# Altium PCB FSP-485.PcbDoc
Units mm, origin at the board's own origin, x right, y up, seen from the top; angles counter-clockwise.
Board outline 152.4 x 101.6 mm, 2 copper layers (Top Layer, Bottom Layer); 62 components, 38 nets, 179 pads, 43 vias.
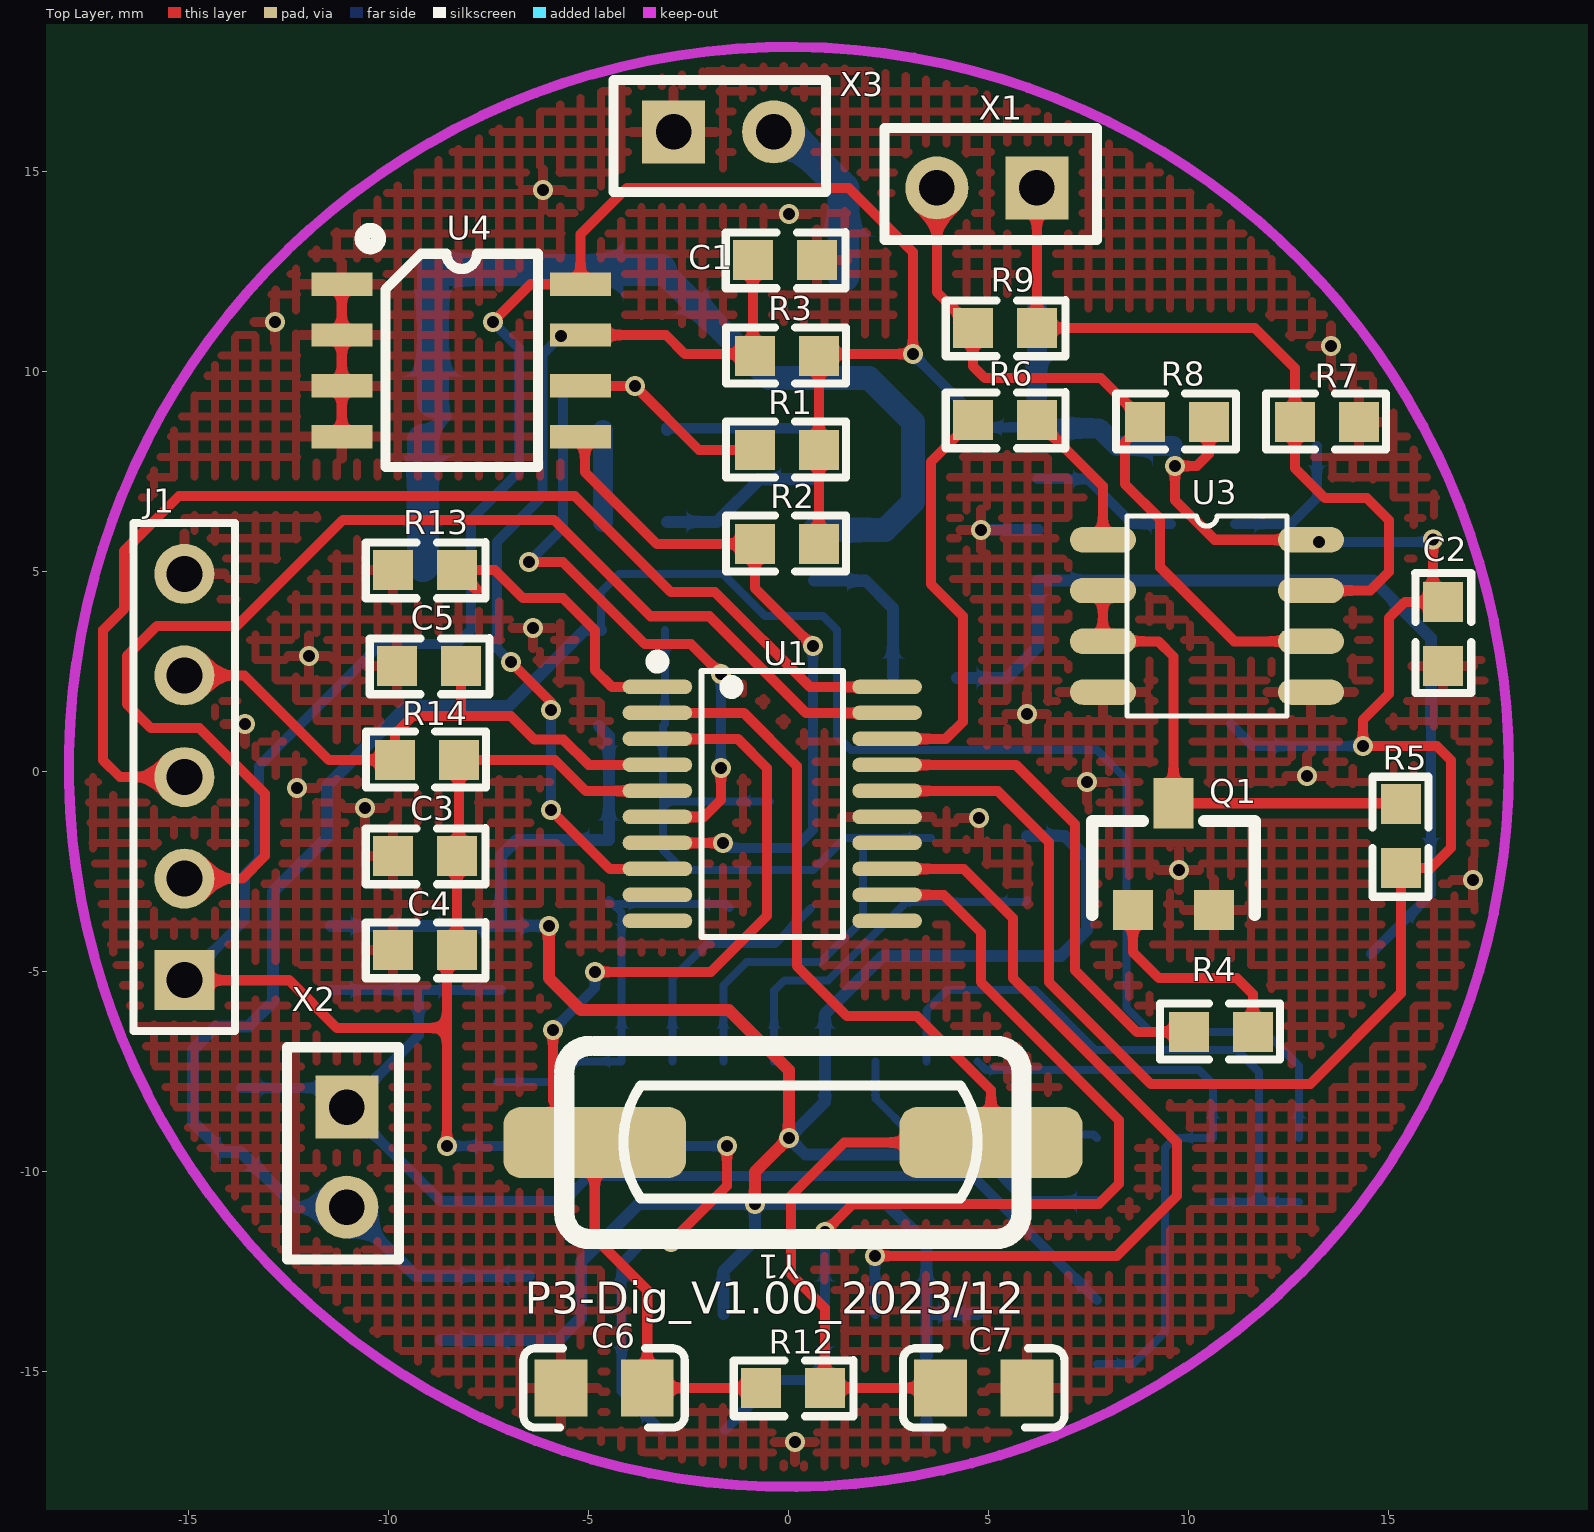
[diagram p0: Top Layer view]
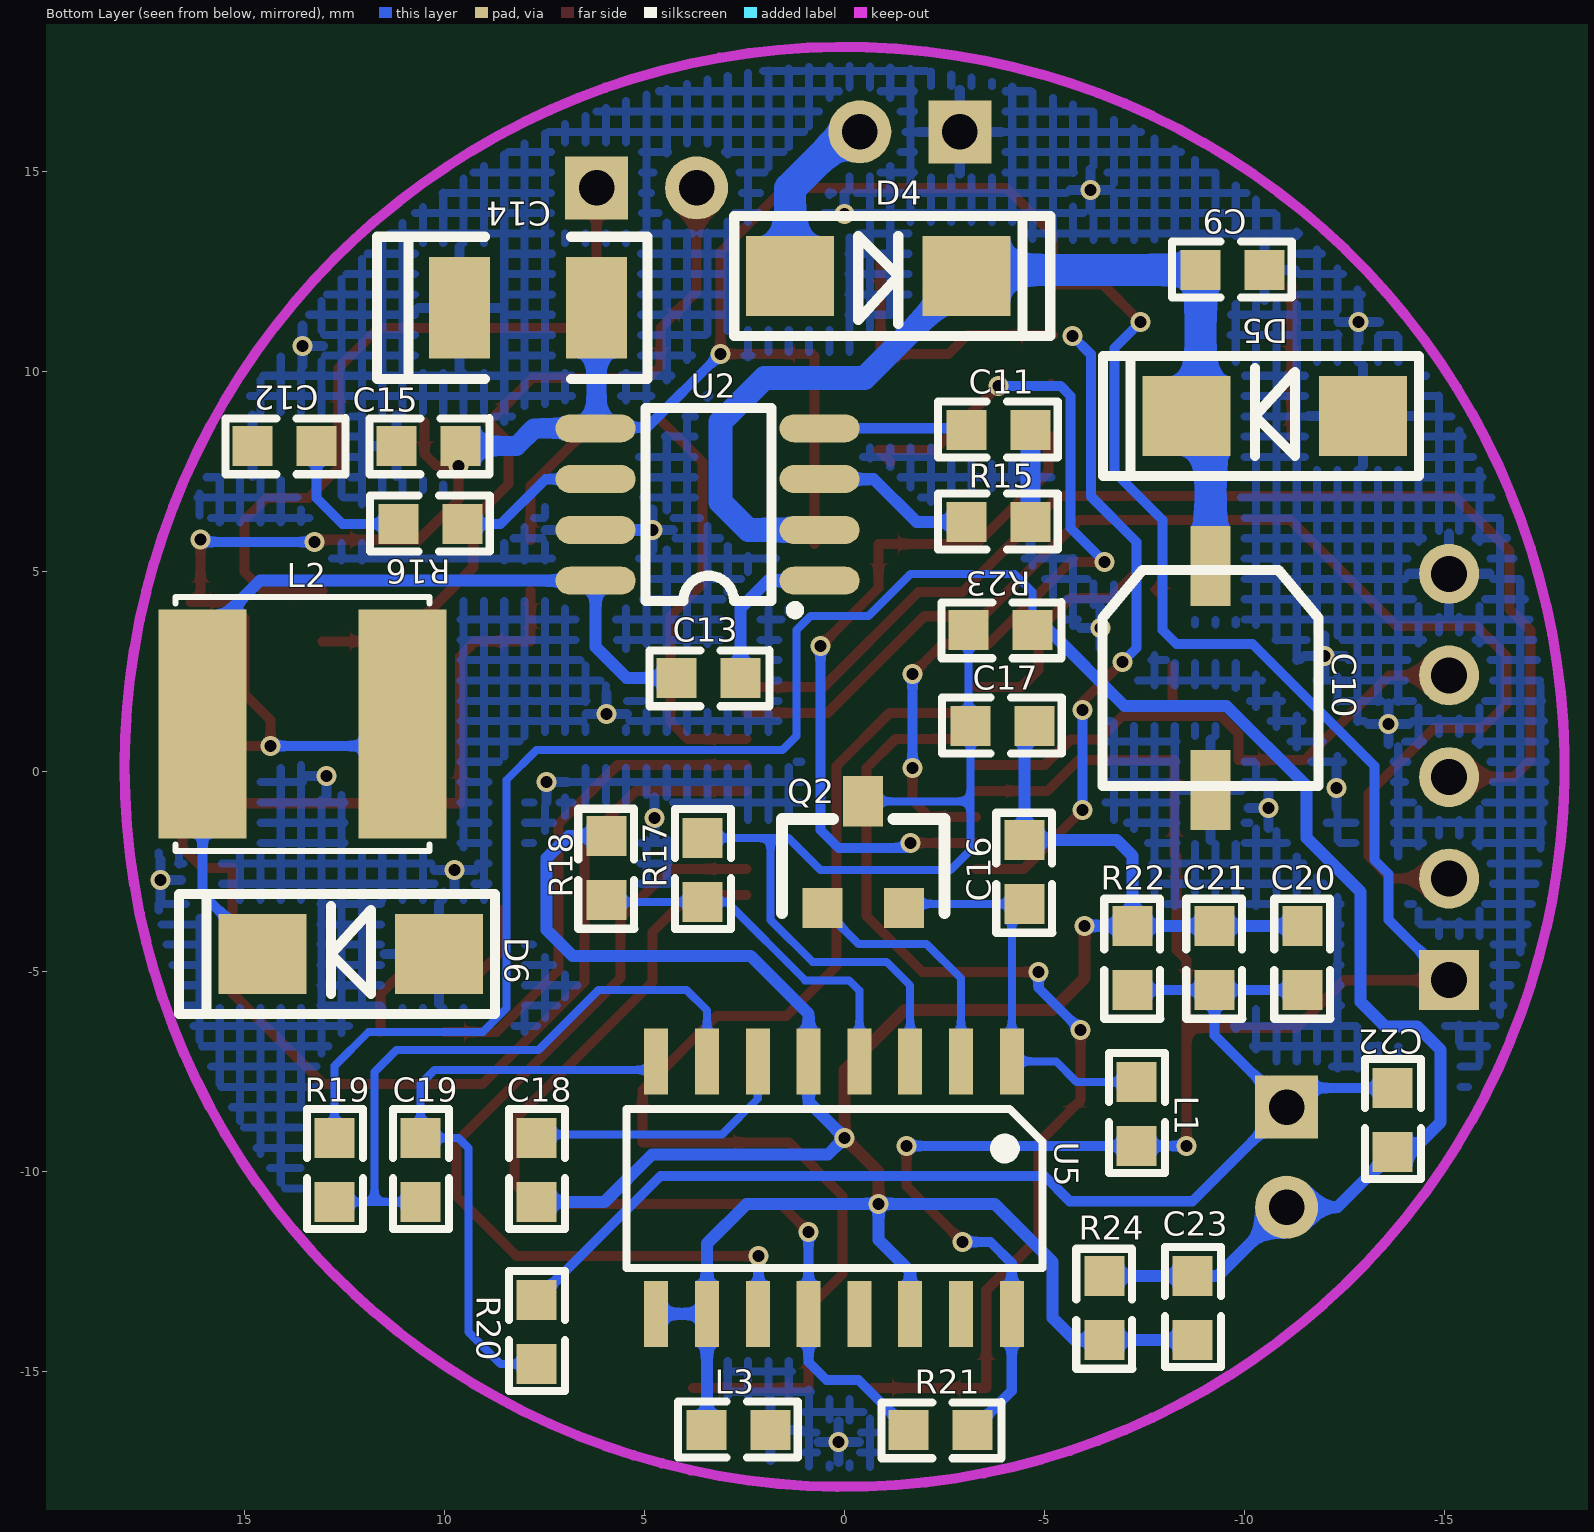
[diagram p1: Bottom Layer view, seen from below]

## Layer stack, top to bottom
Top Solder: solder mask 0.0102, Solder Resist, Dk 3.5
Top Layer: signal copper 0.0356
Dielectric 1: dielectric 0.32, FR-4, Dk 4.8
Bottom Layer: signal copper 0.0356
Bottom Solder: solder mask 0.0102, Solder Resist, Dk 3.5

## Board outline
-66.675,-44.45 85.725,-44.45 85.725,57.15 -66.675,57.15

## Design rules (kind name [scope] priority, off if disabled: settings)
Clearance [All] p1: gap=0.254 ignorepadtopadclearanceinfootprint=FALSE except(0: Arc-Hole Track-Hole SMDPad-Hole THPad-Hole Via-Hole Fill-Hole Poly-Hole Region-Hole Text-Hole)
DiffPairsRouting [All] p1: maxlimit=3 minlimit=0.254 mostfreqgap=0.3 toplayer_minwidth=0.1 toplayer_maxwidth=3 toplayer_prefwidth=0.3 bottomlayer_minwidth=0.1 bottomlayer_maxwidth=3 bottomlayer_prefwidth=0.3 maxuncoupledlength=12.7
HoleToHoleClearance [All] p1: gap=0.1 allowstackedmicrovias=TRUE
MinimumSolderMaskSliver [All] p1: minsoldermaskwidth=0.1
PolygonConnect [All] p1: connectstyle=Relief reliefconductorwidth=0.254 reliefentries=4 polygonreliefangle="90 Angle" airgapwidth=0.254
RoutingVias [All] p1: holewidth=0.3 width=0.5 viastyle="Through Hole" minholewidth=0.1 minwidth=0.3 maxholewidth=6 maxwidth=8
SilkToSilkClearance [All] p1: silktosilkclearance=0
SilkToSolderMaskClearance [IsPad] p1: minsilkscreentomaskgap=0 clearancetoexposedcopper=TRUE
SolderMaskExpansion [All] p1: expansion=0.102 istentingtop=FALSE
Width [All] p1: maxlimit=3 minlimit=0.2 preferedwidth=0.3
25 further rules are at their usual default settings.

## Components (designator, comment, footprint, x,y, rotation, side; value= is the part's Value field where it differs from the comment)
C1 "10uf" R0603 -1.68,13.768 r0 top
C2 "104" R0603 15.382,1.87 r90 top
C3 "104" R0603 -10.68,-1.132 r0 top
C4 "104" R0603 -10.68,-3.482 r0 top
C5 "104" R0603 -10.58,3.618 r0 top
C6 "20PF" 0805C -6.727,-16.296 r0 top
C7 "20PF" 0805C 6.977,-14.504 r180 top
C9 "10UF" R0603 -11.28,11.582 r0 bottom
C10 "220UF" CAP+_47UF_5X5 -9.15,2.35 r180 bottom
C11 "10NF" R0603 -5.43,7.582 r0 bottom
C12 "2.2NF" R0603 15.58,9.118 r180 bottom
C13 "0.1UF" R0603 4.98,3.318 r180 bottom
C14 "220UF" DAN-DIAN-RONG-1210 9.629,11.6 r0 bottom
C15 "10UF" R0603 11.98,9.118 r180 bottom
C16 "10uf" R0603 -5.468,-0.92 r270 bottom
C17 "10uf" R0603 -5.53,0.182 r0 bottom
C18 "104" R0603 8.668,-11.53 r90 bottom
C19 "104" R0603 11.568,-11.53 r90 bottom
C20 "104" R0603 -12.418,-3.07 r270 bottom
C21 "104" R0603 -10.218,-3.07 r270 bottom
C22 "104" R0603 -12.732,-10.28 r90 bottom
C23 "104" R0603 -7.732,-14.98 r90 bottom
D4 "M7" DIODE 1.25,12.387 r180 bottom
D5 "SMCJ-6.5CA" DIODE -12.85,8.913 r0 bottom
D6 "SS14" DIODE 10.25,-4.537 r0 bottom
J1 "Header 5" HDR1X5 -15.113,-5.207 r90 top
L1 "10uH" R0603 -6.332,-10.13 r90 bottom
L2 "Inductor" SMD-6*6MM 15.975,1.193 r180 bottom
L3 "10uH" R0603 1.07,-17.418 r0 bottom
Q1 "S8050" Q8050 7.477,-4.082 r0 top
Q2 "S8550" Q8550 1.927,-4.032 r180 bottom
R1 "4K7" R0603 1.53,7.082 r180 top
R2 "4K7" R0603 1.53,4.732 r180 top
R3 "4K7" R0603 1.53,9.432 r180 top
R4 "4K7" R0603 12.38,-7.468 r180 top
R5 "4K7" R0603 16.268,-0.02 r270 top
R6 "1K" R0603 3.82,9.768 r0 top
R7 "4K7" R0603 15.03,7.782 r180 top
R8 "4K7" R0603 11.28,7.782 r180 top
R9 "120" R0603 3.82,12.068 r0 top
R12 "1M" R0603 -1.48,-14.432 r0 top
R13 "10K" R0603 -10.68,6.018 r0 top
R14 "10K" R0603 -7.47,-0.668 r180 top
R15 "100K" R0603 -5.43,5.282 r0 bottom
R16 "47K" R0603 8.77,5.232 r0 bottom
R17 "2K2" R0603 4.518,-4.03 r90 bottom
R18 "1K" R0603 4.982,-0.82 r270 bottom
R19 "1K" R0603 13.718,-11.53 r90 bottom
R20 "1K" R0603 8.668,-15.58 r90 bottom
R21 "4K7" R0603 -0.82,-15.482 r180 bottom
R22 "10M" R0603 -8.168,-3.07 r270 bottom
R23 "1K" R0603 -2.32,4.518 r180 bottom
R24 "1K" R0603 -7.468,-11.82 r270 bottom
U1 "GD32F130F8P6TR" GD32F130F8P6TR -0.381,-0.635 r270 top
U2 "TPS5403DR" TPS5403DR 3.55,6.4 r90 bottom
U3 "SP3485" MAX485 10.45,3.9 r0 top
U4 "AT24C02" AT24C02 -12.23,7.46 r0 top
U5 "HX711" HX711 4.984,-6.035 r270 bottom
X1 "" CON-2.54mm*2 6.2,14.6 r270 top
X2 "" CON-2.54mm*2 -11.049,-8.382 r0 top
X3 "" CON-2.54mm*2 -2.881,16.002 r90 top
Y1 "8M" XTAL-T -0.127,-9.271 r0 top

## Footprints (in the part's own frame and the unit in brackets; to place one, negate y for a bottom-side part, rotate by r counter-clockwise, add the part's x,y. Pads: shape width x height; smd on the part's side, far side on the other; paste and mask are expansions set on the pad)
0805C [mil]
  rect 52x56 smd: 1(125.43,35.26) 2(40.43,35.26)
  silkscreen extent 3,-4 162,74
AT24C02 [mil]
  rect 60x23 smd: 1(41.48,186.3) 2(41.48,136.3) 3(41.48,86.3) 4(41.48,36.3) 5(276.48,36.3) 6(276.48,86.3) 7(276.48,136.3) 8(276.48,186.3)
  silkscreen extent 62,6 234,239
CAP+_47UF_5X5 [mm]
  rect 1x2 smd: 1(0,2.8) 2(0,-2.8)
  silkscreen extent -2.7,-2.7 2.7,2.7
CON-2.54mm*2 [mil]
  rect 62x62 hole 35: 1(0,0)
  round 62 hole 35: 2(0,-98.43)
  silkscreen extent -59,-150 51,59
DAN-DIAN-RONG-1210 [mil]
  rect 60x100 smd: 1(0,0) 2(-135,0)
  silkscreen extent -185,-70 81,70
DIODE [mm]
  rect 2.2x2 smd: 1(-0.11,0.013) 2(4.3,0.013)
  silkscreen extent -1.51,-1.49 6.39,1.51
GD32F130F8P6TR [mm]
  oval 0.364x1.742 smd mask+0.102: 1(-2.761,-2.905) 2(-2.111,-2.905) 3(-1.461,-2.905) 4(-0.811,-2.905) 5(-0.16,-2.905) 6(0.49,-2.905) 7(1.14,-2.905) 8(1.79,-2.905) 9(2.439,-2.905) 10(3.089,-2.905) 11(3.089,2.837) 12(2.439,2.837) 13(1.79,2.837) 14(1.14,2.837) 15(0.49,2.837) 16(-0.16,2.837) 17(-0.811,2.837) 18(-1.461,2.837) 19(-2.111,2.837) 20(-2.761,2.837)
  silkscreen extent -3.54,-3.05 3.49,1.74
HDR1X5 [mm] "Connector; Header; 5 Position"
  rect 1.5x1.5 hole 0.9: 1(0,0)
  round 1.5 hole 0.9: 2(2.54,0) 3(5.08,0) 4(7.62,0) 5(10.16,0)
  silkscreen extent -1.27,-1.27 11.43,1.27
HX711 [mm]
  rect 1.65x0.6 smd: 1(1.2,9.164) 2(1.2,7.894) 3(1.2,6.624) 4(1.2,5.354) 5(1.2,4.084) 6(1.2,2.814) 7(1.2,1.544) 8(1.2,0.274) 9(7.515,0.274) 10(7.515,1.544) 11(7.515,2.814) 12(7.515,4.084) 13(7.515,5.354) 14(7.515,6.624) 15(7.515,7.894) 16(7.515,9.164)
  silkscreen extent 2.39,-0.46 6.37,9.93
MAX485 [mm]
  oval 1.651x0.635 smd: 1(-2.6,1.905) 2(-2.6,0.635) 3(-2.6,-0.635) 4(-2.6,-1.905) 5(2.6,-1.905) 6(2.6,-0.635) 7(2.6,0.635) 8(2.6,1.905)
  silkscreen extent -2,-2.5 2,2.5
Q8050 [mm]
  rect 1x1 smd: 1(3.155,0.632) 2(1.123,0.632)
  rect 1x1.27 smd: 3(2.139,3.299)
  silkscreen extent 0.11,0.5 4.17,2.85
Q8550 [mm]
  rect 1x1 smd: 1(3.409,0.632) 2(1.377,0.632)
  rect 1x1.27 smd: 3(2.393,3.299)
  silkscreen extent 0.36,0.5 4.43,2.85
R0603 [mm]
  rect 1x1 smd: 1(2.38,-0.968) 2(0.78,-0.968)
  silkscreen extent 0.1,-1.68 3.1,-0.28
SMD-6*6MM [mm]
  rect 2.2x5.72 smd mask+0.102: 1(-0.075,0.007) 2(4.925,0.007)
  silkscreen extent -0.75,-3.17 5.6,3.18
TPS5403DR [mm]
  oval 0.7x2 smd mask+0.102: 1(-1.619,-2.926) 2(-0.349,-2.926) 3(0.921,-2.926) 4(2.191,-2.926) 5(2.191,2.674) 6(0.921,2.674) 7(-0.349,2.674) 8(-1.619,2.674)
  silkscreen extent -2.46,-2.41 2.7,1.42
XTAL-T [mil]
  rrect50% 180x70 smd: 1(-186.03,0.29) 2(203.97,0.29)
  silkscreen extent -216,-95 234,95

## Part data
C1 C2 C3 C4 C5 C6 C7 C9 C10 C11 C12 C13 C14 C15 C18 C19 C20 C21 C22 C23: library part Cap, "Capacitor"
C16 C17: library part "Cap Pol3", "Polarized Capacitor (Surface Mount)"
D4 D5: library part DIODE, "Diode"
D6: library part "DIODE SCHOTTKY", "Schottky Diode"
J1: "Header, 5-Pin"
L1 L3: library part Inductor, "Inductor"
Q1: library part 2N3904, "NPN General Purpose Amplifier"
Q2: library part 2N3906, "PNP General Purpose Amplifier"
R1 R2 R3 R4 R5 R6 R7 R8 R9 R12 R13 R14 R15 R16 R17 R18 R19 R20 R21 R22 R23 R24: library part Res1, "Resistor"
U3: library part MAX485
U4: library part M24C02BN6, "2Kbit Serial I睠 Bus EEPROM"
X1 X2 X3: library part CON2, "Connector"
Y1: library part XTAL, "Crystal Oscillator"

## Via types
v1: diameter 0.5, hole 0.3, Top Layer to Bottom Layer, 43 vias

## Nets (pads, with @x,y where several pads share a name; then routed paths per layer and width w, separated by ;. In a path a pad name is that pad's centre, name@x,y a point inside that pad or via, vN(x,y) a via of type N, cw(c..) or ccw(c..) an arc to the next point about the centre after c; other vN are vias at no path point)
+12V: C9.1 C10.1 D4.2 D5.2 U2.2 | length 26.1
  Bottom Layer w0.254: D5.2@-9.15,8.3 D5.2 D5.2@-8.9,9.25 ; D4.2@-3.2,12.55 D4.2
  Bottom Layer w0.6: D4.2 -0.5,9.85 2,9.85 3.1,8.75 3.1,6.75 2.401,6.051 U2.2
  Bottom Layer w0.8: C10.1 D5.2@-9.15,8.3 ; D5.2@-8.9,9.25 C9.1 D4.2@-3.2,12.55
AD-RAD: C20.1 C21.1 C22.1 R20.1 R22.1 X2.1 | length 32
  Bottom Layer w0.254: C22.1 -11.531,-7.9 X2.1 ; C20.1 C21.1 ; R22.1 C21.1 ; R20.1 4.6,-10.1 -5,-10.1 -5.631,-10.731 -8.7,-10.731 X2.1 ; X2.1 -9.25,-6.583 C21.1
COM_FX: C22.2 C23.1 R19.1 R23.1 R24.2 X2.2 | length 59.1
  Bottom Layer w0.2: R23.1 -4.7,4.5 -4.25,4.95 -1.65,4.95 -0.6,3.9 0.85,3.9 1.204,3.546 1.204,2.9 1.2,2.896 1.2,0.9 1.55,0.55 7.7,0.55 8.446,-0.196 8.446,-5.9 9.042,-6.496 11.896,-6.496 12.75,-7.35 R19.1
  Bottom Layer w0.3: R24.2 C23.1 -9.331,-12.6 X2.2 -12.318,-10.882 C22.2 -14.15,-9.5 -14.9,-8.75 -14.9,-6.95 -14.311,-6.361 -13.511,-6.361 -12.9,-5.75 -12.9,-3 -11.55,-1.65 -11.55,-0.35 -9.546,1.654 -6.996,1.654 -5.1,3.55 R23.1
DGND: C16.2 C17.2 C18.2 C20.2 C21.2 C23.2 L3.1 R18.2 R22.2 R24.1 U5.5 U5.9 U5.10 U5.14 | length 71.5
  Top Layer w0.3: v1(-6,-3.85) -6,-5.15 -5.2,-5.95 -1.5,-5.95 0,-7.45 v1(0,-9.15) -0.85,-10 v1(-0.85,-10.8)
  Bottom Layer w0.3: C20.2 C21.2 R22.2 ; C23.2 R24.1 -5.75,-14.2 -5.2,-13.65 -5.2,-12.25 -3.75,-10.8 v1(-0.85,-10.8) ; v1(-6,-3.85) R22.2 ; C17.2 -4.5,0.9 C16.2 -6.8,-1.7 -7.2,-2.1 R22.2 ; U5.14 -1.64,-12.49 -0.85,-11.7 v1(-0.85,-10.8) ; L3.1 3.44,-16.44 U5.10 ; U5.9 U5.10 ; R18.2 6.9,-1.6 7.45,-2.15 7.45,-3.95 6.8,-4.6 2.35,-4.6 0.9,-6.05 U5.5 0.9,-8.25 v1(0,-9.15) 0.419,-9.569 4.82,-9.569 6.001,-10.75 C18.2 ; v1(-0.85,-10.8) 2.45,-10.8 3.44,-11.79 U5.10
DOUT1: R21.2 U1.12 U5.12 | length 24.8
  Top Layer w0.254: v1(0.9,-11.5) 1.6,-10.8 7.75,-10.8 8.25,-10.3 8.25,-8.7 4.8,-5.25 4.8,-4 3.874,-3.074 U1.12
  Bottom Layer w0.254: R21.2 -0.35,-15.2 0.45,-15.2 0.9,-14.75 U5.12 v1(0.9,-11.5)
GND: C1.1 C2.2 C3.2 C4.2 C5.2 C6.2 C7.2 C9.2 C10.2 C11.2 C12.2 C14.1 C15.2 D5.1 D6.1 J1.5 L3.2 Q1.1 R7.2 R13.2 R15.2 U1.15 U2.7 U3.4 U3.5 U4.1 U4.2 U4.3 U4.4 X3.1 | length 7.5
  Top Layer w0.254: U4.4 -11.176,9.85 U4.2 U4.1
  Bottom Layer w0.254: U2.7 U2.7
  Bottom Layer w0.3: v1(4.8,6.05) U2.7
  Bottom Layer w0.5: R15.2 C11.2
  other v1: 0.15,-16.75 17.1,-2.7 9.75,-2.45 4.75,-1.15 -10.6,-0.9 -12.3,-0.4 7.45,-0.25 12.95,-0.1 -13.6,1.2 5.95,1.45 -12,2.9 -6.4,3.6 13.55,10.65 -12.85,11.25 0,13.95 -6.15,14.55
ICECLK: J1.3 U1.20 | length 29.3
  Top Layer w0.254: J1.3 -16.723,-0.127 -17.145,0.295 -17.145,3.545 -16.619,4.071 -16.619,5.527 -15.246,6.9 -5.35,6.9 -2.95,4.5 -1.85,4.5 0.524,2.126 U1.20
ICEDAT: J1.2 U1.19 | length 31.8
  Top Layer w0.254: J1.2 -13.667,-2.667 -13.1,-2.1 -13.1,-0.541 -14.741,1.1 -15.95,1.1 -16.55,1.7 -16.55,2.9 -15.8,3.65 -13.8,3.65 -11.15,6.3 -5.868,6.3 -3.46,3.892 -1.992,3.892 0.424,1.476 U1.19
ICERST: C5.1 J1.4 R14.1 U1.4 | length 15.3
  Top Layer w0.254: J1.4 -13.613,2.413 -11.5,0.3 R14.1 -9.85,0.95 -9.4,1.4 -8.2,1.4 ; C5.1 -8.2,1.4 ; U1.4 -5.006,0.176 -5.639,0.808 -6.358,0.808 -6.95,1.4 -8.2,1.4
NetC6_1: C6.1 R12.2 U1.3 Y1.1 | length 26.3
  Top Layer w0.254: v1(-5.9,-6.45) -5.9,-8.216 Y1.1 -4.852,-11.648 -3.541,-12.959 C6.1 R12.2 ; v1(-4.85,-5) -1.95,-5 -0.55,-3.6 -0.55,0.1 -1.276,0.826 U1.3
  Bottom Layer w0.254: v1(-5.9,-6.45) -4.85,-5.4 v1(-4.85,-5)
NetC7_1: C7.1 R12.1 U1.2 Y1.2 | length 30.1
  Top Layer w0.254: U1.2 -1.126,1.476 0.2,0.15 0.2,-4.85 1.45,-6.1 3.2,-6.1 5.054,-7.954 Y1.2 1.386,-9.264 0.05,-10.6 0.05,-12.55 0.9,-13.4 R12.1 C7.1
NetC11_1: C11.1 U2.4 | length 3.8
  Bottom Layer w0.254: C11.1 -3.009,8.591 U2.4 U2.4@0.615,8.6
  Bottom Layer w0.3: C11.1 C11.1@-3.05,8.6
NetC12_1: C12.1 R16.1 | length 3.6
  Bottom Layer w0.254: R16.1 12.55,6.2 13.2,6.85 C12.1
NetC13_1: C13.1 U2.1 | length 4
  Bottom Layer w0.3: U2.1 1.919,4.781 2.6,4.1 C13.1
NetC13_2: C13.2 D6.2 L2.1 U2.8 | length 22.9
  Bottom Layer w0.254: D6.2 16.05,-3.05 L2.1
  Bottom Layer w0.3: C13.2 5.45,2.35 6.224,3.124 U2.8 14.619,4.781 16.05,3.35 L2.1
NetC16_1: C16.1 L1.1 Q2.1 U5.1 | length 10.6
  Bottom Layer w0.2: L1.1 -5.8,-7.75 -5.285,-7.235 U5.1 -4.18,-3.52 C16.1@-4.4,-3.3 ; C16.1 C16.1@-4.4,-3.3 ; C16.1@-4.5,-3.2 C16.1@-4.4,-3.3 ; Q2.1 -1.582,-3.3 C16.1@-4.4,-3.3
NetC17_1: C17.1 Q2.3 R17.1 R23.2 U5.3 | length 23.6
  Bottom Layer w0.2: -3.15,-0.733 Q2.3 ; R23.2 -3.1,1.2 C17.1 -3.15,-1.95 -2.65,-2.45 0.6,-2.45 1.4,-1.65 1.85,-1.65 ; U5.3 -1.64,-5.34 -1.054,-4.754 0.796,-4.754 1.85,-3.7 1.85,-1.65 ; R17.1 1.85,-1.65
NetC18_1: C18.1 U5.6 | length 6.9
  Bottom Layer w0.2: U5.6 2.17,-8.17 3.065,-9.065 7.615,-9.065 C18.1
NetC19_1: C19.1 R20.2 U5.8 | length 15.4
  Bottom Layer w0.2: U5.8 4.925,-7.45 10.25,-7.45 10.6,-7.8 C19.1 9.65,-9.15 9.4,-9.4 9.4,-14 8.6,-14.8 R20.2
NetC19_2: C19.2 R19.2 U5.7 | length 16
  Bottom Layer w0.2: U5.7 3.44,-5.96 3.95,-5.45 6.15,-5.45 7.65,-6.95 11.2,-6.95 11.75,-7.5 11.75,-10.75 ; C19.2 11.75,-10.75 ; R19.2 11.75,-10.75
NetD4_1: D4.1 X3.2 | length 4.5
  Bottom Layer w0.254: X3.2 X3.2@-0.052,16.002
  Bottom Layer w0.8: X3.2@-0.052,16.002 1.36,14.59 D4.1
NetQ1_2: Q1.2 R4.2 | length 5.4
  Top Layer w0.254: Q1.2 8.6,-4.5 9.25,-5.15 11.2,-5.15 11.6,-5.55 R4.2
NetQ1_3: Q1.3 R5.2 U3.2 U3.3 | length 12.6
  Top Layer w0.254: U3.2 U3.3 9.235,3.265 9.616,2.884 Q1.3 15.283,-0.783 R5.2
NetQ2_2: Q2.2 U5.2 | length 6.3
  Bottom Layer w0.2: U5.2 -2.91,-5.16 -2.05,-4.3 -0.35,-4.3 Q2.2
NetR6_1: R6.1 U3.1 | length 3.7
  Top Layer w0.254: R6.1 7.85,7.15 U3.1
NetR13_1: R13.1 U1.1 | length 6.8
  Top Layer w0.254: R13.1 -7.35,5.05 -6.65,4.35 -5.65,4.35 -4.85,3.55 -4.85,2.55 -4.426,2.126 U1.1
NetR15_1: R15.1 U2.3 | length 4.1
  Bottom Layer w0.3: R15.1 -1.8,6.25 -0.729,7.321 U2.3
NetR16_2: R16.2 U2.6 | length 3.8
  Bottom Layer w0.254: U2.6 7.479,7.321 8.6,6.2 R16.2
NetR17_2: R17.2 R18.1 U5.4 | length 9
  Bottom Layer w0.2: U5.4 -0.37,-5.47 -0.108,-5.208 0.984,-5.208 2.9,-3.292 2.9,-3.25 R17.2 5.9,-3.25 R18.1
RX1: R6.2 U1.18 | length 10.4
  Top Layer w0.254: U1.18 3.926,0.826 4.35,1.25 4.35,3.9 3.55,4.7 3.55,7.75 R6.2
SCK1: U1.13 U5.11 | length 21.9
  Top Layer w0.254: v1(2.15,-12.1) 8.2,-12.1 9.7,-10.6 9.7,-9.25 5.6,-5.15 5.6,-3.65 4.375,-2.425 U1.13
  Bottom Layer w0.254: v1(2.15,-12.1) 2.15,-13.53 U5.11
SCL: R1.1 U1.6 U4.6 | length 22.8
  Top Layer w0.254: v1(-6.5,5.25) -5.65,5.25 -3.6,3.2 -2.45,3.2 v1(-1.7,2.45) ; U4.6@-5.159,9.7 U4.6 v1(-3.85,9.652) -2.248,8.05 R1.1 R1.1@-1.15,7.75 ; U1.6 -2.125,-1.125 -1.7,-0.7 v1(-1.7,0.1)
  Bottom Layer w0.254: v1(-6.5,5.25) -5.65,6.1 -5.65,9.4 -5.398,9.652 v1(-3.85,9.652) ; v1(-1.7,0.1) v1(-1.7,2.45)
SDA: R2.1 U1.7 U4.5 | length 17.8
  Top Layer w0.254: U4.5 -5.1,8.275 -5.1,7.5 -3.3,5.7 R2.1 -0.85,4.6 v1(0.6,3.15) ; U1.7 v1(-1.65,-1.775)
  Bottom Layer w0.254: v1(-1.65,-1.775) -1.525,-1.9 0.15,-1.9 0.6,-1.45 v1(0.6,3.15)
TX1: R4.1 U1.17 | length 12.4
  Top Layer w0.254: U1.17 5.674,0.176 7.15,-1.3 7.15,-4.95 8.7,-6.5 R4.1
VCC-3.3V: C2.1 C3.1 C4.1 C14.2 C15.1 J1.1 L1.2 L2.2 R1.2 R2.2 R3.2 R5.1 R8.2 R14.2 R21.1 U1.5 U1.16 U2.5 U3.8 U4.8 U5.16 | length 140.8
  Top Layer w0.254: J1.1 -12.493,-5.207 -11.3,-6.4 -8.55,-6.4 ; v1(-8.55,-9.35) -8.55,-6.4 ; v1(-7.4,11.25) -6.458,12.192 U4.8 -5.207,13.443 -4.05,14.6 1.5,14.6 3.1,13 v1(3.1,10.45) 0.8,10.45 R3.2 R1.2 R2.2 ; U1.5 -5.075,-0.475 -5.849,0.3 R14.2 -8.25,-2.05 C3.1 C4.1 -8.55,-4.7 -8.55,-6.4 ; v1(-2.95,-11.75) -1.55,-10.35 v1(-1.55,-9.35) ; U1.16 5.225,-0.475 6.5,-1.75 6.5,-5.25 9.05,-7.8 13.035,-7.8 15.3,-5.535 R5.1 16.05,-2.4 16.55,-1.9 16.55,0.3 16.2,0.65 v1(14.35,0.65) 14.35,1.3 15,1.95 15,3.85 15.4,4.25 C2.1 16.1,4.5 v1(16.1,5.805) ; R8.2 10.5,7.95 10.2,7.65 v1(9.65,7.65) 9.65,6.8 10.645,5.805 U3.8
  Bottom Layer w0.254: J1.1 -13.6,-3.694 -13.6,-2.55 -13.25,-2.2 -13.25,0.15 -10.2,3.2 -8.3,3.2 -7.95,3.55 -7.95,6.3 -6.75,7.5 -6.75,10.6 v1(-7.4,11.25) ; v1(-8.55,-9.35) L1.2 v1(-1.55,-9.35) ; R21.1 -4.18,-15.47 U5.16 -4.18,-12.28 -3.65,-11.75 v1(-2.95,-11.75) ; v1(3.1,10.45) 4.935,8.615 6.2,8.615 U2.5 ; C14.2@6.221,11.85 C14.2@6.224,11.847 ; C15.1 9.65,8.1 v1(9.65,7.65) ; L2.2 11.6,0.65 v1(14.35,0.65) ; v1(13.25,5.75) 16.045,5.75 v1(16.1,5.805)
  Bottom Layer w0.5: U2.5@6.2,8.615 C14.2 ; U2.5 7.759,8.591 8.2,8.15 C15.1
WP: C1.2 R3.1 U1.8 U4.7 | length 23.2
  Top Layer w0.254: v1(-6.95,2.75) -5.95,1.75 v1(-5.95,1.55) ; v1(-5.95,-0.95) -4.475,-2.425 U1.8 ; U4.7 -3.072,10.922 -2.6,10.45 -0.9,10.45 C1.2
  Bottom Layer w0.254: v1(-6.95,2.75) -7.3,3.1 -7.3,5.75 -6.158,6.892 -6.158,10.442 v1(-5.7,10.9) ; v1(-5.95,-0.95) v1(-5.95,1.55)
Z485-A: R8.1 R9.2 U3.6 X1.2 | length 18.4
  Top Layer w0.254: X1.2 3.7,12 R9.2 4.6,10.15 4.9,9.85 7.8,9.85 R8.1 8.4,8.25 8.4,7.2 9.282,6.319 9.282,5.119 11.135,3.265 U3.6
Z485-B: R7.1 R9.1 U3.7 X1.1 | length 19.2
  Top Layer w0.254: X1.1 R9.1 11.65,11.1 12.65,10.1 R7.1 12.65,7.6 13.4,6.85 14.45,6.85 15,6.3 15,5 14.535,4.535 U3.7
pads on no net: U1.9 U1.10 U1.11 U1.14 U5.13 U5.15

## Polygon pours and split planes (outlines as drawn)
GND on Bottom Layer "Bottom Layer-GND" (hatched 90Degree grid 0.508 track 0.203, remove dead copper, pour order 34): -18.127,0.127 ccw(c0,0.127) 0,-18 ccw(c0,0.127) 18.127,0.127 ccw(c0,0.127) 0,18.254 ccw(c0,0.127)
GND on Top Layer "Top Layer-GND" (hatched 90Degree grid 0.508 track 0.203, remove dead copper, pour order 36): -18.127,0.127 ccw(c0,0.127) 0,-18 ccw(c0,0.127) 18.127,0.127 ccw(c0,0.127) 0,18.254 ccw(c0,0.127)

## Keep-outs
Keep-Out Layer:
  circle w0.254: c0,0.127 r18

## Silkscreen, mask and mechanical layers (free items; w line width, h text height)
Top Overlay:
  text "P3-Dig_V1.00_2023/12" at -6.6,-13.55 h0.8